# Altium PCB TSOP Board.PcbDoc
Units mm, origin at the board's own origin, x right, y up, seen from the top; angles counter-clockwise.
Board outline 100 x 100 mm, 2 copper layers (Top Layer, Bottom Layer); 56 components, 24 nets, 183 pads, 9 vias.
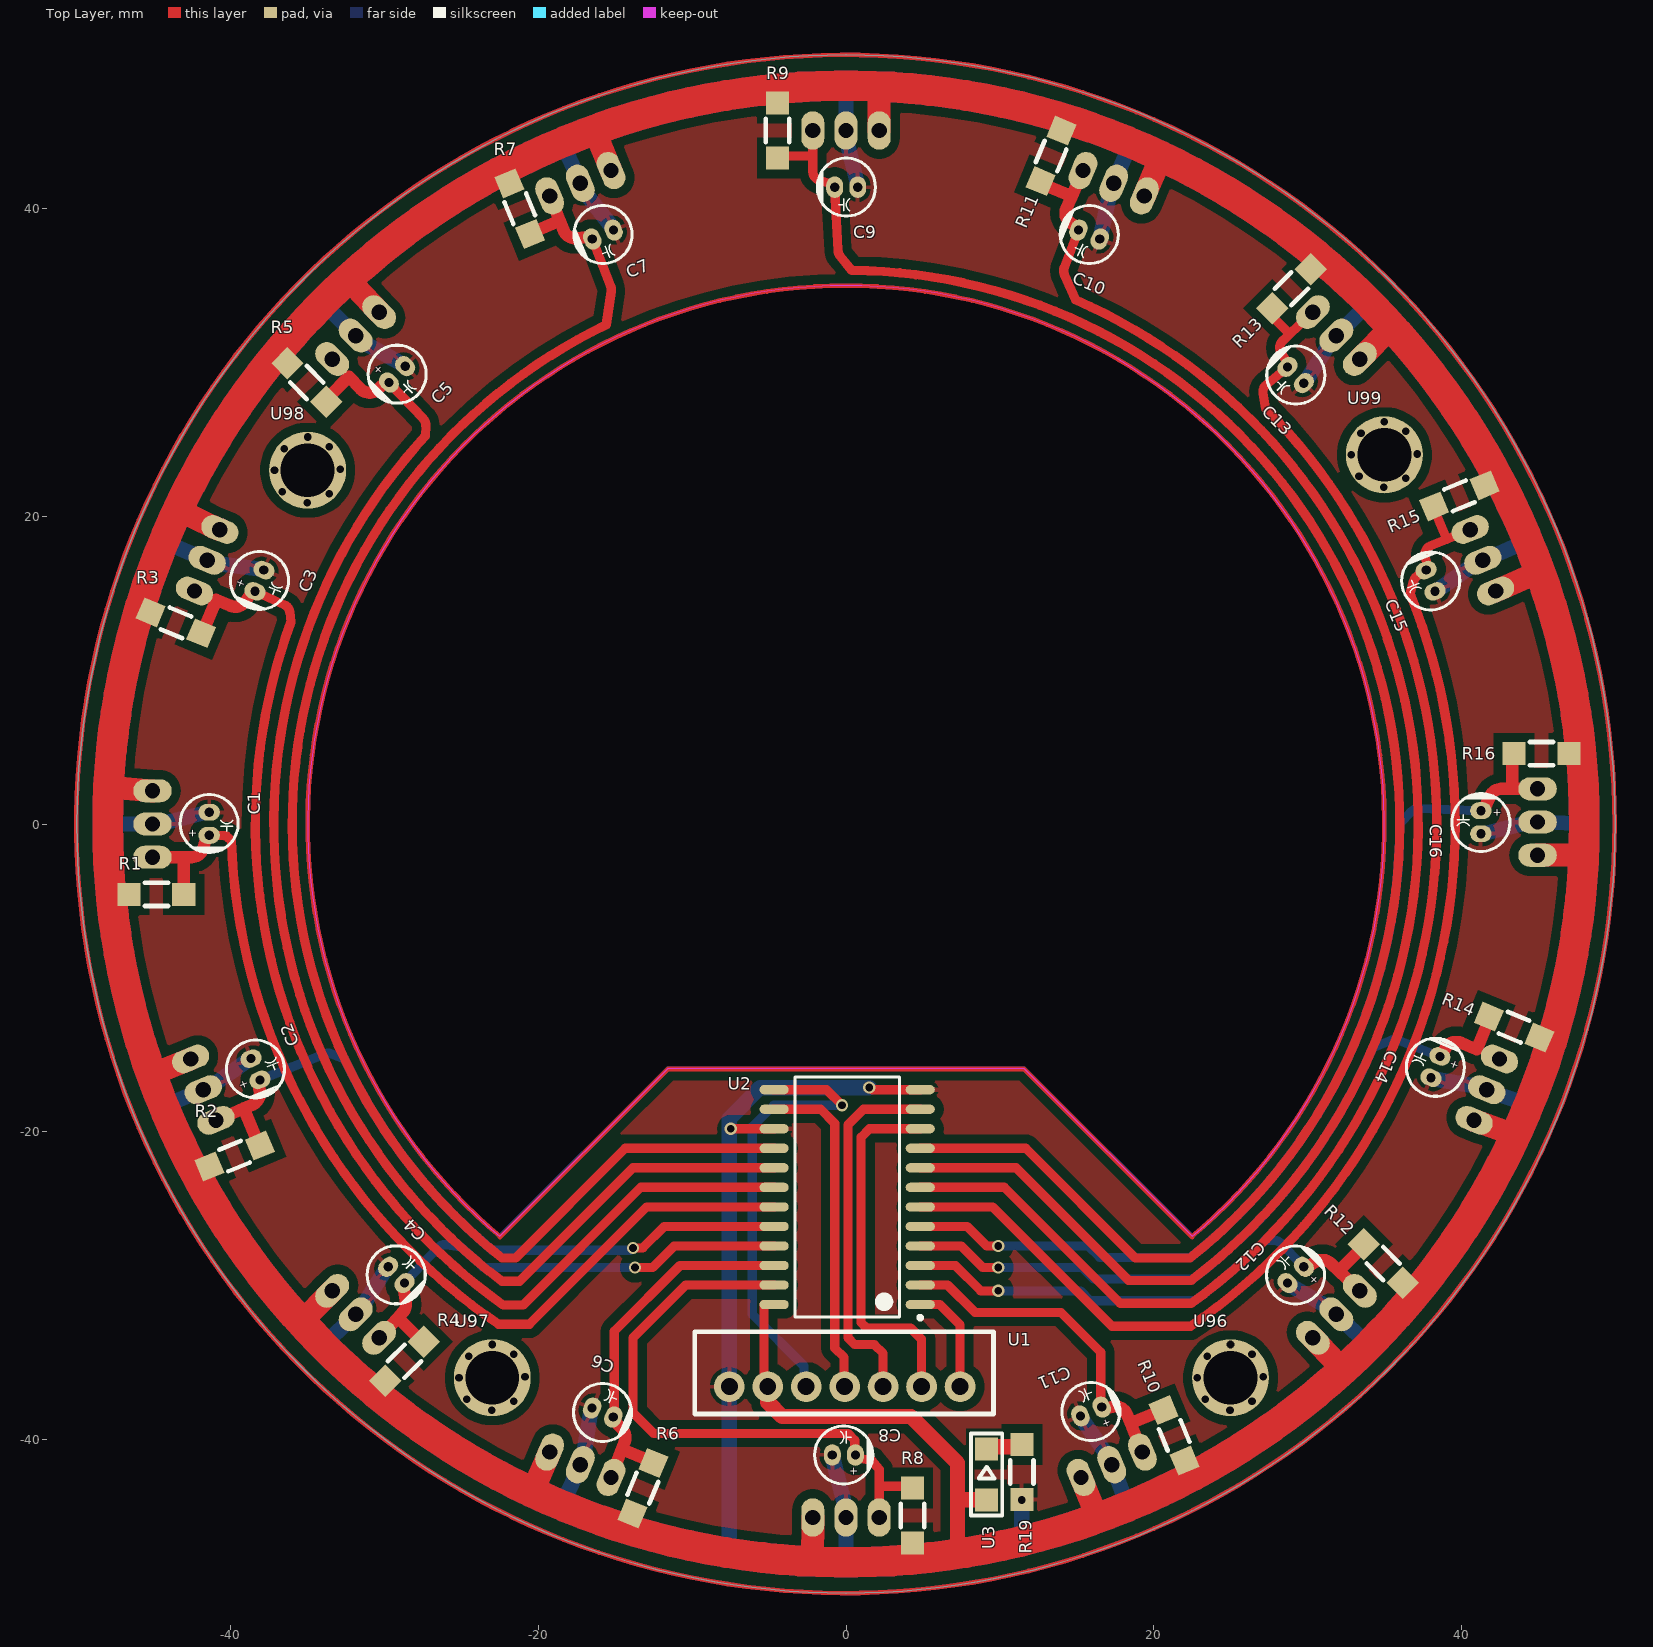
[diagram p0: Top Layer view]
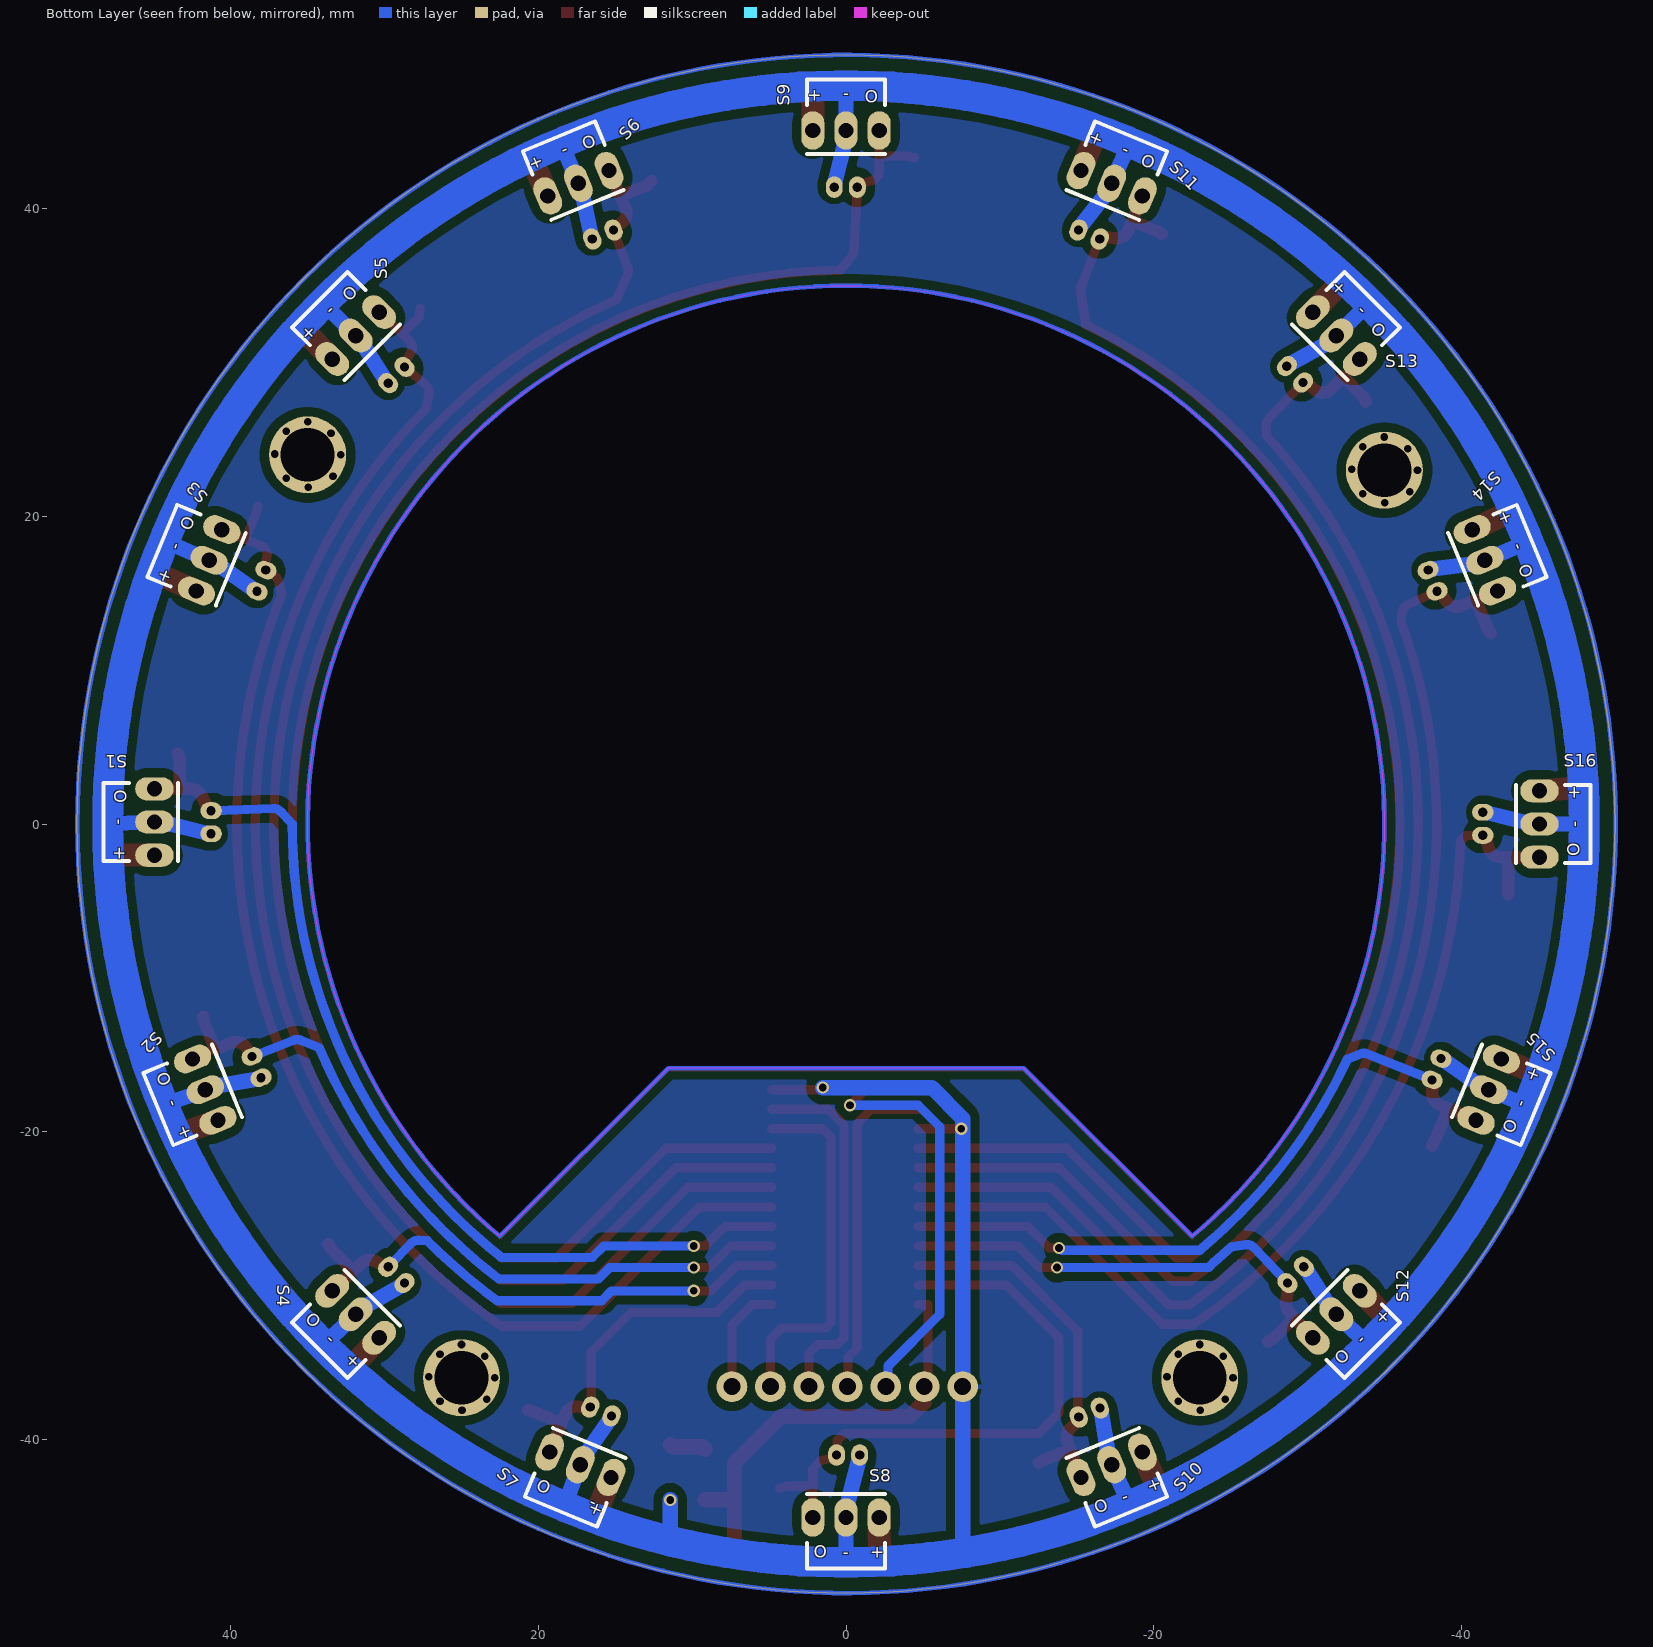
[diagram p1: Bottom Layer view, seen from below]
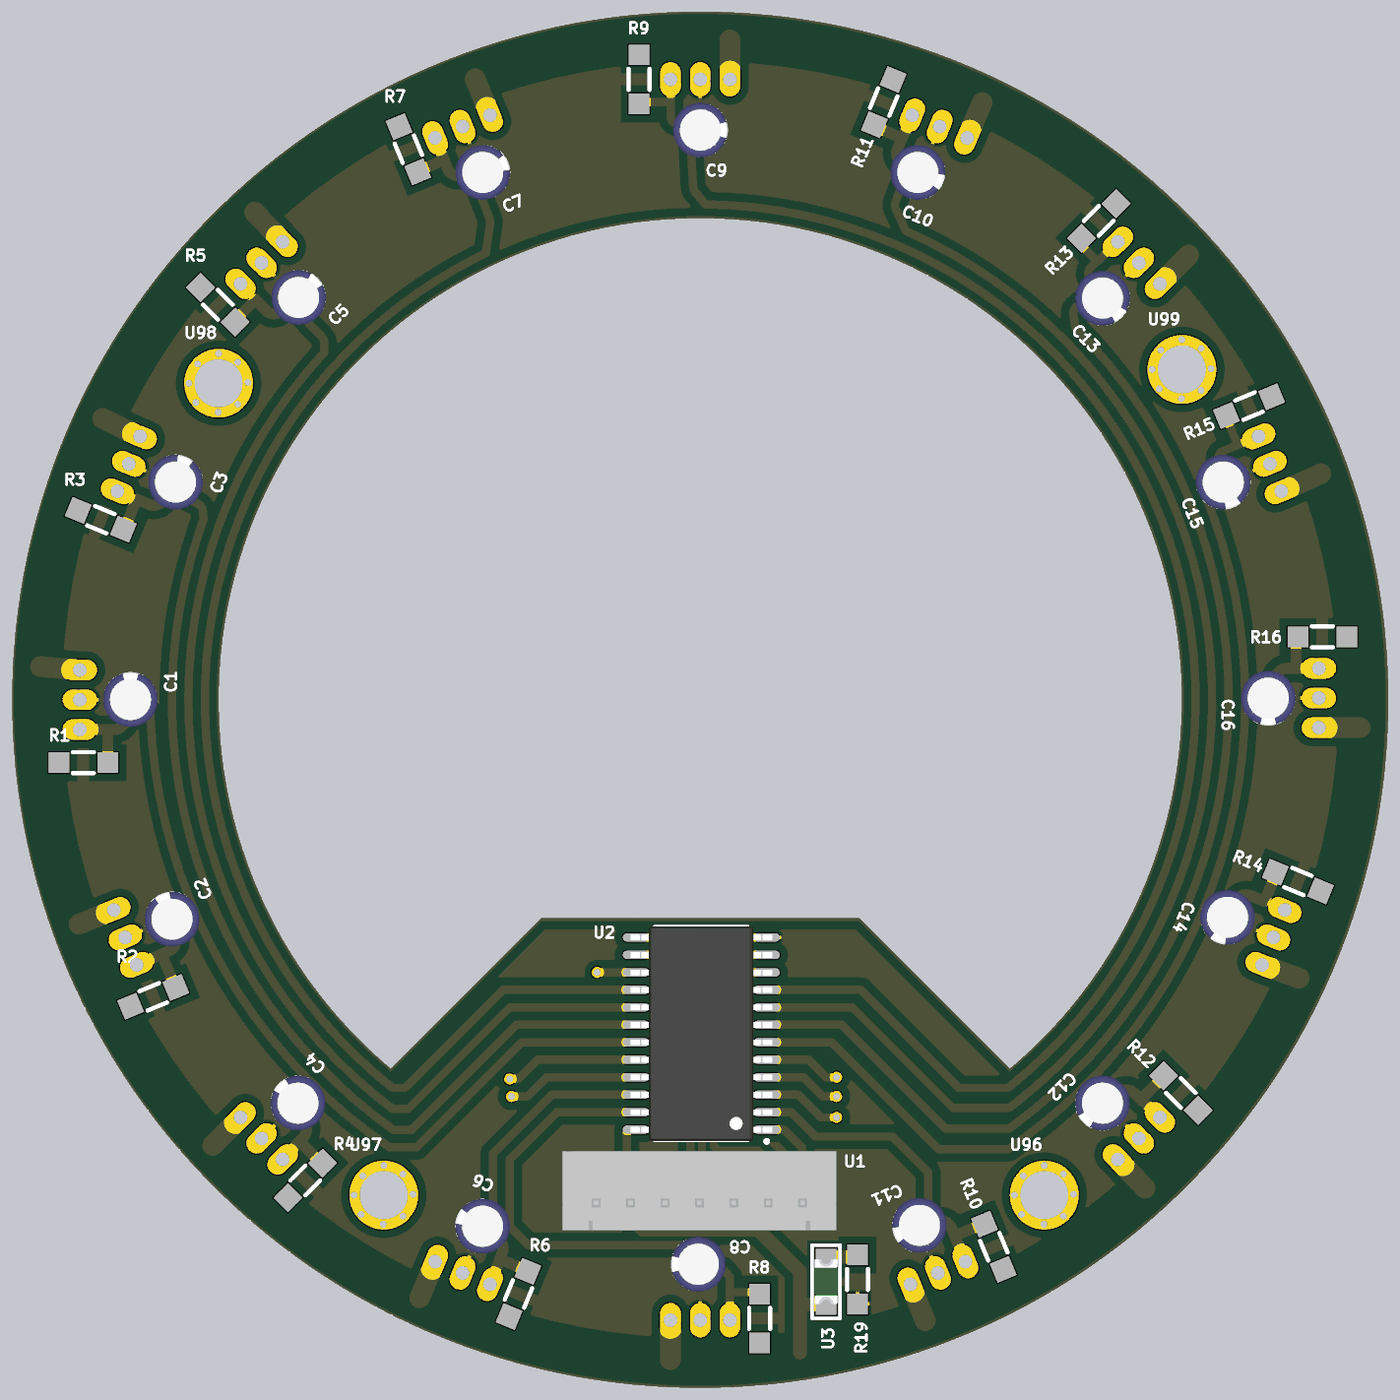
[diagram p2: 3D render of the assembled board from above, using the file's embedded part models]
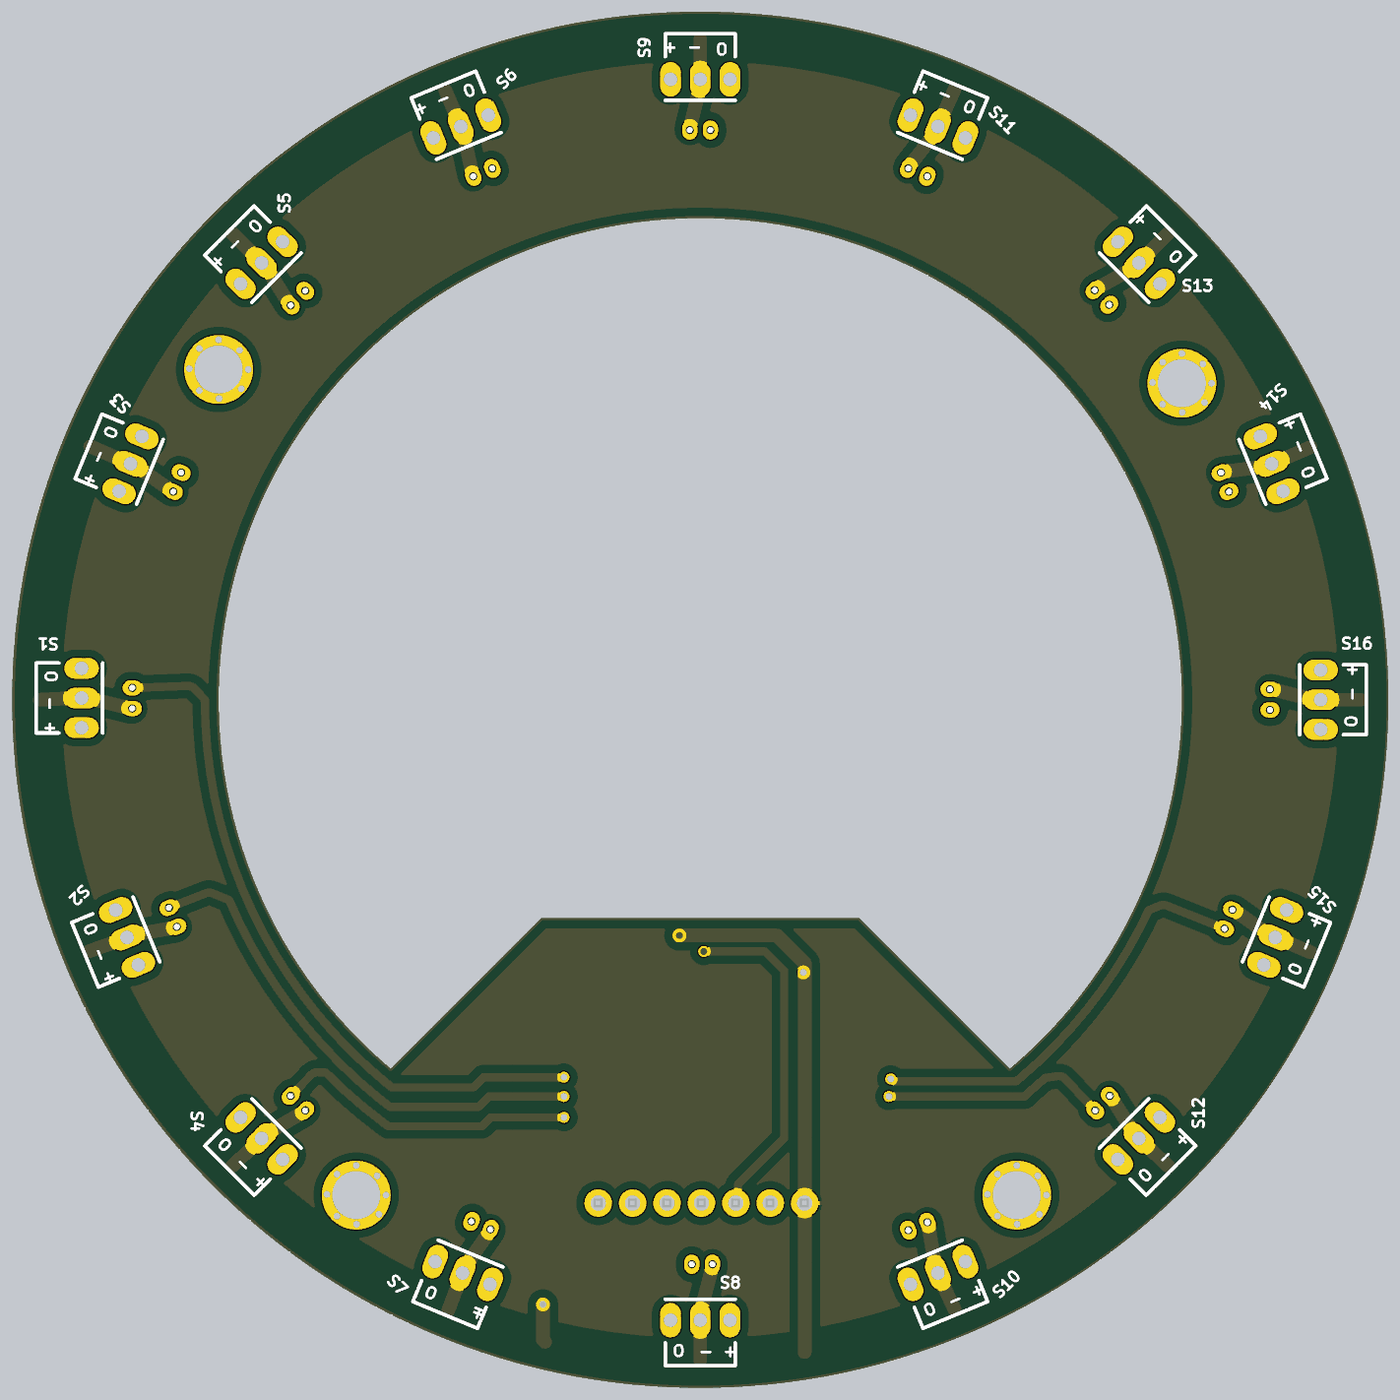
[diagram p3: 3D render of the assembled board from below, using the file's embedded part models]

## Layer stack, top to bottom
Top Solder: solder mask 0.0102, Solder Resist, Dk 3.5
Top Layer: signal copper 0.0356
Dielectric 1: dielectric 0.32, FR-4, Dk 4.8
Bottom Layer: signal copper 0.0356
Bottom Solder: solder mask 0.0102, Solder Resist, Dk 3.5

## Board outline
0,-50 cw(c0,0) -50,0 cw(c0,0) 0,50 cw(c0,0) 50,0 cw(c0,0)
cut-out: -22.498,-26.812 -11.561,-15.875 11.561,-15.875 22.498,-26.812 ccw(c0,0)

## Design rules (kind name [scope] priority, off if disabled: settings)
Clearance [All] p1: gap=0.254 ignorepadtopadclearanceinfootprint=FALSE except(0: Arc-Hole Track-Hole SMDPad-Hole THPad-Hole Via-Hole Fill-Hole Poly-Hole Region-Hole Text-Hole; 0.6: Arc-Fill Arc-Poly Arc-Region Track-Fill Track-Poly Track-Region SMDPad-Fill SMDPad-Poly SMDPad-Region THPad-Fill THPad-Poly THPad-Region Via-Fill Via-Poly Via-Region Fill-Fill Fill-Poly Fill-Region Poly-Poly Poly-Region Region-Region)
PolygonConnect [All] p1: connectstyle=Relief reliefconductorwidth=0.254 reliefentries=4 polygonreliefangle="90 Angle" airgapwidth=0.254
RoutingVias [All] p1: holewidth=0.6 width=0.8 viastyle="Through Hole" minholewidth=0.5 minwidth=0.8 maxholewidth=0.6 maxwidth=1
SolderMaskExpansion [All] p1: expansion=0.102 istentingtop=FALSE
Width [All] p1: maxlimit=2 minlimit=0.254 preferedwidth=0.254
30 further rules are at their usual default settings.

## Components (designator, comment, footprint, x,y, rotation, side; value= is the part's Value field where it differs from the comment)
C1 "Comment" "Cap electrolitic radial 4x7-1.5" -41.402,-0.738 r90 top
C2 "Comment" "Cap electrolitic radial 4x7-1.5" -38.1,-16.637 r112.5 top
C3 "Comment" "Cap electrolitic radial 4x7-1.5" -38.42,15.124 r67.5 top
C4 "Comment" "Cap electrolitic radial 4x7-1.5" -28.702,-29.845 r135 top
C5 "Comment" "Cap electrolitic radial 4x7-1.5" -29.718,28.702 r45 top
C6 "Comment" "Cap electrolitic radial 4x7-1.5" -15.124,-38.547 r157.5 top
C7 "Comment" "Cap electrolitic radial 4x7-1.5" -16.499,38.034 r22.5 top
C8 "Comment" "Cap electrolitic radial 4x7-1.5" 0.611,-41.021 r180 top
C9 "Comment" "Cap electrolitic radial 4x7-1.5" -0.738,41.402 r0 top
C10 "Comment" "Cap electrolitic radial 4x7-1.5" 15.113,38.608 r337.5 top
C11 "Comment" "Cap electrolitic radial 4x7-1.5" 16.626,-37.907 r202.5 top
C12 "Comment" "Cap electrolitic radial 4x7-1.5" 29.763,-28.784 r225 top
C13 "Comment" "Cap electrolitic radial 4x7-1.5" 28.702,29.718 r315 top
C14 "Comment" "Cap electrolitic radial 4x7-1.5" 38.608,-15.113 r247.5 top
C15 "Comment" "Cap electrolitic radial 4x7-1.5" 37.719,16.51 r292.5 top
C16 "Comment" "Cap electrolitic radial 4x7-1.5" 41.275,0.865 r270 top
R1 "Comment" RES1206 -44.831,-4.572 r180 top
R2 "Comment" RES1206 -39.751,-21.59 r202.5 top
R3 "Comment" RES1206 -43.561,13.081 r157.5 top
R4 "Comment" RES1206 -28.702,-34.925 r225 top
R5 "Comment" RES1206 -35.052,28.702 r135 top
R6 "Comment" RES1206 -13.208,-43.18 r247.5 top
R7 "Comment" RES1206 -21.209,40.005 r112.5 top
R8 "Comment" RES1206 4.318,-44.958 r270 top
R9 "Comment" RES1206 -4.445,45.085 r90 top
R10 "Comment" RES1206 21.336,-39.751 r292.5 top
R11 "Comment" RES1206 13.335,43.434 r67.5 top
R12 "Comment" RES1206 34.925,-28.575 r315 top
R13 "Comment" RES1206 28.956,34.798 r45 top
R14 "Comment" RES1206 43.434,-13.208 r337.5 top
R15 "Comment" RES1206 39.878,21.336 r22.5 top
R16 "Comment" RES1206 45.212,4.572 r0 top
R19 "Comment" RES1206 11.43,-42.127 r270 top
S1 "Comment" TSOP 44.958,0.127 r270 bottom
S2 "Comment" TSOP 41.656,-17.272 r247.5 bottom
S3 "Comment" TSOP 41.402,17.145 r292.5 bottom
S4 "Comment" TSOP 31.877,-31.877 r225 bottom
S5 "Comment" TSOP 31.877,31.75 r315 bottom
S6 "Comment" TSOP 17.399,41.656 r337.5 bottom
S7 "Comment" TSOP 17.272,-41.656 r202.5 bottom
S8 "Comment" TSOP 0,-45.085 r180 bottom
S9 "Comment" TSOP 0,45.085 r0 bottom
S10 "Comment" TSOP -17.272,-41.656 r157.5 bottom
S11 "Comment" TSOP -17.272,41.656 r22.5 bottom
S12 "Comment" TSOP -31.877,-31.877 r135 bottom
S13 "Comment" TSOP -31.877,31.75 r45 bottom
S14 "Comment" TSOP -41.529,17.145 r67.5 bottom
S15 "Comment" TSOP -41.783,-17.272 r112.5 bottom
S16 "Comment" TSOP -45.085,0 r90 bottom
U1 "Comment" "XH 7PIN" -0.064,-38.1 r0 top locked
U2 "Comment" 4067 0.076,-24.257 r180 top locked
U3 "Comment" "LED GREEN 1206" 9.144,-42.291 r90 top
U96 "Comment" SCREW 25,-36 r0 top
U97 "Comment" SCREW -23,-36 r0 top
U98 "Comment" SCREW -35,23 r0 top
U99 "Comment" SCREW 35,24 r0 top

## Footprints (in the part's own frame and the unit in brackets; to place one, negate y for a bottom-side part, rotate by r counter-clockwise, add the part's x,y. Pads: shape width x height; smd on the part's side, far side on the other; paste and mask are expansions set on the pad)
4067 [mm] "SOP, 24-Leads, Body 15.40x7.50mm, Pitch 1.27mm, IPC Medium Density"
  oval 1.9x0.6 smd: 1(-4.75,6.985) 2(-4.75,5.715) 3(-4.75,4.445) 4(-4.75,3.175) 5(-4.75,1.905) 6(-4.75,0.635) 7(-4.75,-0.635) 8(-4.75,-1.905) 9(-4.75,-3.175) 10(-4.75,-4.445) 11(-4.75,-5.715) 12(-4.75,-6.985) 13(4.75,-6.985) 14(4.75,-5.715) 15(4.75,-4.445) 16(4.75,-3.175) 17(4.75,-1.905) 18(4.75,-0.635) 19(4.75,0.635) 20(4.75,1.905) 21(4.75,3.175) 22(4.75,4.445) 23(4.75,5.715) 24(4.75,6.985)
  silkscreen extent -4.88,-7.8 3.4,7.96, body extent -5.15,-7.8 5.15,7.8, height 2.65
"Cap electrolitic radial 4x7-1.5" [mm] "Cap electrolitic radial 5x11-2-Design:Ali Hafizi"
  oval 1.1x1.4 hole 0.6: 1(0,0) 2(1.5,0)
  silkscreen extent -1.12,-1.89 2.65,1.89, body extent -1.25,-2 2.75,2, height 8.5
"LED GREEN 1206" [mm]
  rect 1.5x1.5 smd: 1(-1.651,0) 2(1.651,0)
  silkscreen extent -2.67,-1.02 2.67,1.02, body extent -1.63,-0.83 1.64,0.82, height 0.9
RES1206 [mm]
  rect 1.5x1.5 smd: 1(-1.778,0) 2(1.778,0)
  silkscreen extent -0.76,-0.76 0.76,0.76, body extent -1.58,-0.82 1.58,0.82, height 0.53
SCREW [mm]
  round 5 hole 3.5: 1(0,0)
  round 0 hole 0.5: ""(-2.159,0) ""(-1.651,-1.397) ""(-1.524,1.397) ""(-0.031,-2.11) ""(0,2.159) ""(1.397,-1.524) ""(1.397,1.524) ""(2.128,0.059)
TSOP [mm]
  oval 1.5x2.5 hole 1: 1(-2.159,0) 2(0,0) 3(2.159,0)
  silkscreen extent -2.54,-3.3 2.54,1.52, body extent -2.54,-3.4 2.54,1.4, height 11
"XH 7PIN" [mm]
  round 2 hole 1.1: 1(-7.523,1.524) 2(-5.023,1.524) 3(-2.523,1.524) 4(-0.023,1.524) 5(2.477,1.524) 6(4.977,1.524) 7(7.477,1.524)
  silkscreen extent -9.78,-0.25 9.65,5.08, body extent -9.95,-0.46 9.95,5.29, height 7

## Via types
v1: diameter 0.8, hole 0.5, Top Layer to Bottom Layer, 9 vias

## Nets (pads, with @x,y where several pads share a name; then routed paths per layer and width w, separated by ;. In a path a pad name is that pad's centre, name@x,y a point inside that pad or via, vN(x,y) a via of type N, cw(c..) or ccw(c..) an arc to the next point about the centre after c; other vN are vias at no path point)
ADD1: U1.6 U2.10 | length 23.6
  Top Layer w0.6: U2.10 1.524,-19.812 0.981,-20.355 0.981,-32.415 1.332,-32.766 4.191,-32.766 4.913,-33.488 U1.6
ADD2: U1.5 U2.11 | length 23.8
  Top Layer w0.6: U1.5 2.413,-34.417 1.841,-33.845 0.571,-33.845 0.127,-33.401 0.127,-19.558 1.143,-18.542 U2.11
ADD3: U1.4 U2.14 | length 21.7
  Top Layer w0.6: U2.14 -1.651,-18.542 -0.727,-19.466 -0.727,-34.071 -0.122,-34.676 -0.122,-36.541 U1.4
ADD4: U1.3 U2.13 | length 29.6
  Top Layer w0.6: U2.13 -1.27,-17.272 v1(-0.254,-18.288)
  Bottom Layer w0.6: U1.3 -2.735,-36.427 -2.735,-35.238 -6.096,-31.877 -6.096,-19.685 -4.699,-18.288 v1(-0.254,-18.288)
GND: C1.2 C2.2 C3.2 C4.2 C5.2 C6.2 C7.2 C8.2 C9.2 C10.2 C11.2 C12.2 C13.2 C14.2 C15.2 C16.2 R19.2 S1.2 S2.2 S3.2 S4.2 S5.2 S6.2 S7.2 S8.2 S9.2 S10.2 S11.2 S12.2 S13.2 S14.2 S15.2 S16.2 U1.1 U2.12 U2.15 | length 456.5
  Top Layer w0.6: v1(-7.493,-19.812) U2.15 ; v1(1.513,-17.134) 1.567,-17.134 1.705,-17.272 U2.12
  Bottom Layer w1: -48,0 S16.2 -44.585,0 -41.552,0.762 C1.2 ; -44.353,-18.353 -42.245,-17.463 S15.2 -41.321,-17.081 -38.813,-15.309 C2.2 ; -44.353,18.353 -41.991,17.336 S14.2 -41.067,16.954 -37.985,16.567 C3.2 ; -34.004,-33.878 -32.231,-32.231 S12.2 -31.523,-31.523 -29.869,-28.89 C4.2 ; -34.005,33.878 -32.231,32.104 S13.2 -31.523,31.396 -28.763,29.869 C5.2 ; -18.48,-44.3 -17.463,-42.118 S10.2 -17.081,-41.194 -16.567,-38.112 C6.2 ; -18.462,44.308 -17.463,42.118 S11.2 -17.081,41.194 -15.17,38.747 C7.2 ; -7.584,-47.397 -7.587,-47.394 U1.1 -7.587,-19.144 -5.577,-17.134 v1(1.513,-17.134) ; C8.2 -0.889,-41.171 0,-44.585 S8.2 0,-45.585 0,-48 ; 0,48 0,45.585 S9.2 0,44.585 0.762,41.552 C9.2 ; 11.283,-46.655 11.43,-46.508 v1(11.43,-43.942) ; C11.2 15.297,-38.62 17.081,-41.194 S7.2 17.463,-42.118 18.308,-44.371 ; C10.2 16.556,38.173 17.208,41.194 S6.2 17.59,42.118 18.525,44.281 ; C12.2 28.808,-29.951 31.523,-31.523 S4.2 32.231,-32.231 34.004,-33.878 ; C13.2 29.869,28.763 31.523,31.396 S5.2 32.231,32.104 34.004,33.878 ; C14.2 38.173,-16.556 41.194,-17.081 S2.2 42.118,-17.463 44.39,-18.263 ; C15.2 38.432,15.182 40.94,16.954 S3.2 41.864,17.336 44.326,18.416 ; C16.2 41.425,-0.635 44.458,0.127 S1.2 45.458,0.127 48,0
  Bottom Layer w2: 48,0 ccw(c0,0) 48,0
LED: R19.1 U3.2 | length 2.4
  Top Layer w1: U3.2 9.29,-40.494 11.284,-40.494 R19.1
OUT: U1.7 U2.1 | length 7.1
  Top Layer w0.6: U2.1 6.096,-31.242 7.413,-32.559 U1.7
S0: C9.1 R9.1 S9.1 U2.9 | length 121.7
  Top Layer w0.6: R9.1 -3.995,43.434 -2.159,43.434 ; S9.1 -2.159,44.585 -2.159,43.434 ; U2.9 11.684,-21.082 18.812,-28.21 22.365,-28.21 ccw(c0,0) 0.379,35.998 -0.384,36.932 -0.385,36.933 cw(c0.081,37.312) -0.518,37.279 -0.738,41.252 C9.1 -0.738,41.552 -1.732,41.852 cw(c-1.559,42.426) -2.159,42.426 -2.159,43.434
S1: C10.1 R11.1 S6.1 U2.8 | length 109.8
  Top Layer w0.6: U2.8 11.049,-22.352 18.365,-29.668 22.442,-29.668 ccw(c0,0) 14.931,34.072 14.198,35.715 14.197,35.716 cw(c14.746,35.959) 14.185,36.172 15.056,38.469 C10.1
  Top Layer w0.8: R11.1 12.926,41.531 14.676,40.806 ; C10.1 15.17,38.747 14.687,39.007 cw(c15.067,39.712) 14.334,40.034 14.335,40.035 14.676,40.806 ; S6.1 15.213,42.02 14.676,40.806
S2: C13.1 R13.1 S5.1 U2.7 | length 97.3
  Top Layer w0.6: U2.7 10.287,-23.622 17.825,-31.16 22.441,-31.16 ccw(c0,0) 27.274,27.031 27.11,27.983 27.109,27.984 cw(c27.701,28.085) 27.317,28.546 28.596,29.612 C13.1 28.808,29.824 28.285,30.65 cw(c28.791,30.971) 28.381,31.409 28.853,31.851 ; R13.1 27.749,32.955 28.853,31.851 ; S5.1 29.997,32.923 28.853,31.851
S3: C15.1 R15.1 S3.1 U2.6 | length 83.4
  Top Layer w0.6: U2.6 9.525,-24.892 17.287,-32.654 22.402,-32.654 ccw(c0,0) 36.665,14.962 36.897,15.788 ; 36.897,15.789 cw(c37.475,15.626) 37.116,16.107 37.58,16.453 C15.1 37.858,16.567 37.649,17.37 cw(c38.23,17.521) 37.999,18.075 38.001,18.076 39.057,18.512 ; R15.1 38.351,20.216 39.057,18.512 ; S3.1 40.114,18.948 39.057,18.512
S4: C16.1 R16.1 S1.1 U2.5 | length 63.2
  Top Layer w0.6: U2.5 7.874,-26.162 9.144,-27.432 v1(9.906,-27.432)
  Top Layer w0.8: C16.1 41.425,0.865 41.885,1.83 cw(c42.607,1.486) 42.607,2.286 43.307,2.286 ; R16.1 43.307,4.222 43.307,2.286 ; S1.1 43.307,2.286
  Bottom Layer w0.6: v1(9.906,-27.432) 15.748,-27.432 16.49,-28.174 22.411,-28.174 ccw(c0,0) 36,0 36.771,0.818 cw(c37.208,0.407) 37.229,1.006 41.125,0.865 C16.1
S5: C14.1 R14.1 S2.1 U2.4 | length 47.9
  Top Layer w0.6: U2.4 7.493,-27.432 8.89,-28.829 v1(9.906,-28.829)
  Top Layer w0.8: C14.1 38.722,-15.16 38.93,-14.658 cw(c39.669,-14.964) 39.978,-14.226 39.979,-14.227 41,-14.656 41.734,-12.883 R14.1
  Bottom Layer w0.6: v1(9.906,-28.829) 15.367,-28.829 16.113,-29.575 22.564,-29.575 ccw(c0,0) 34.234,-14.555 35.466,-14.059 35.467,-14.059 cw(c35.69,-14.616) 35.908,-14.057 38.469,-15.056 C14.1
S6: C12.1 R12.1 S4.1 U2.3 | length 35
  Top Layer w0.6: U2.3 7.112,-28.702 8.763,-30.353 v1(9.906,-30.353)
  Top Layer w0.8: C12.1 29.869,-28.89 30.516,-28.467 cw(c30.954,-29.137) 31.499,-28.552 32.034,-29.05 ; S4.1 33.05,-29.997 32.034,-29.05 ; R12.1 33.47,-27.615 32.034,-29.05
  Bottom Layer w0.6: v1(9.906,-30.353) 15.24,-30.353 15.881,-30.994 22.669,-30.994 ccw(c0,0) 27.212,-27.093 27.797,-27.064 cw(c27.827,-27.664) 28.256,-27.244 29.657,-28.678 C12.1
S7: C11.1 R10.1 S7.1 U2.2 | length 24.1
  Top Layer w0.6: U2.2 6.604,-29.972 8.382,-31.75 13.97,-31.75 16.568,-34.348 16.568,-37.85 C11.1
  Top Layer w0.8: C11.1 16.683,-38.046 17.321,-37.892 cw(c17.509,-38.67) 18.247,-38.363 18.248,-38.364 18.493,-38.957 ; S7.1 19.075,-40.368 18.493,-38.957 ; R10.1 20.315,-38.202 18.493,-38.957
S8: C8.1 R8.1 S8.1 U2.23 | length 38.9
  Top Layer w0.6: U2.23 -10.414,-29.972 -13.843,-33.401 -13.843,-38.276 -12.495,-39.624 0.127,-39.624 0.567,-40.064 0.567,-41.127 0.611,-41.171 1.671,-41.374 2.159,-41.964 2.159,-43.053 ; S8.1 2.159,-44.585 2.159,-43.053 ; R8.1 3.868,-43.053 2.159,-43.053
S9: C6.1 R6.1 S10.1 U2.22 | length 24.4
  Top Layer w0.6: C6.1 -15.067,-38.49 -15.067,-32.974 -10.795,-28.702 U2.22
  Top Layer w0.8: S10.1 -15.086,-42.02 -14.567,-40.654 ; C6.1 -15.182,-38.686 -14.559,-39.316 cw(c-15.128,-39.878) -14.379,-40.16 -14.38,-40.162 -14.567,-40.654 ; R6.1 -12.837,-41.371 -14.567,-40.654
S10: C4.1 R4.1 S12.1 U2.21 | length 32.8
  Top Layer w0.6: v1(-13.716,-28.829) -12.573,-28.829 -11.176,-27.432 U2.21
  Top Layer w0.8: S12.1 -29.997,-33.05 -29.123,-32.095 ; C4.1 -28.808,-29.951 -28.611,-31.074 cw(c-29.399,-31.212) -28.809,-31.752 -29.123,-32.095 ; R4.1 -27.745,-33.473 -29.123,-32.095
  Bottom Layer w0.6: C4.1 -28.596,-29.739 -26.504,-27.531 cw(c-26.068,-27.943) -25.984,-27.349 -25.982,-27.349 -25.074,-27.48 ccw(c0,0) -23.912,-28.497 -23.58,-28.829 v1(-13.716,-28.829)
S11: C2.1 R2.1 S15.1 U2.20 | length 47.8
  Top Layer w0.6: v1(-13.843,-27.559) -13.841,-27.557 -13.206,-27.557 -11.811,-26.162 U2.20
  Top Layer w0.8: S15.1 -40.495,-19.075 -39.14,-18.486 ; R2.1 -38.266,-20.596 -39.14,-18.486 ; C2.1 -38.239,-16.694 -38.114,-17.362 cw(c-38.9,-17.509) -38.581,-18.243 -39.14,-18.486
  Bottom Layer w0.6: C2.1 -37.961,-16.58 -33.88,-14.949 cw(c-33.657,-15.506) -33.432,-14.95 ; -33.431,-14.95 -32.59,-15.292 ccw(c0,0) -23.14,-27.578 -23.006,-27.712 -14.05,-27.712 -13.897,-27.559 v1(-13.843,-27.559)
S12: C1.1 R1.1 S16.1 U2.19 | length 66.9
  Top Layer w0.6: C1.1 -41.252,-0.738 -40.534,-0.754 -40.366,-0.758 cw(c-40.38,-1.357) -40.288,-0.764 -40.123,-0.929 cw(c-40.547,-1.354) -40.122,-0.93 -39.957,-1.095 ccw(c-0.181,0.379) -22.584,-32.521 -20.583,-32.521 -12.954,-24.892 U2.19
  Top Layer w0.8: S16.1 -43.053,-2.159 ; R1.1 -43.053,-2.159 ; C1.1 -41.552,-0.738 -41.785,-1.574 cw(c-42.556,-1.359) -42.556,-2.159 -43.053,-2.159
S13: C3.1 R3.1 S14.1 U2.18 | length 79.6
  Top Layer w0.6: C3.1 -38.281,15.067 -36.497,14.237 cw(c-36.751,13.693) -36.155,13.766 ; -36.155,13.764 -36.08,13.144 ccw(c0,0) -22.284,-31.273 -20.986,-31.273 -13.335,-23.622 U2.18
  Top Layer w0.8: R3.1 -41.726,12.7 -40.952,14.569 -40.951,14.57 -40.009,14.181 -40.007,14.181 ccw(c-39.704,14.921) -39.043,14.471 -38.559,15.182 C3.1
S14: C5.1 R5.1 S13.1 U2.17 | length 92.9
  Top Layer w0.6: C5.1 -29.612,28.596 -27.477,26.343 cw(c-27.913,25.931) -27.313,25.912 -27.335,25.232 ccw(c0,0) -22.361,-29.729 -21.22,-29.729 -13.843,-22.352 U2.17
  Top Layer w0.8: R5.1 -33.623,27.768 -32.309,29.082 -31.569,28.295 -31.567,28.294 ccw(c-30.986,28.843) -30.453,28.246 -29.824,28.808 C5.1
S15: C7.1 R7.1 S11.1 U2.16 | length 106
  Top Layer w0.6: C7.1 -16.441,37.895 -15.297,34.945 cw(c-15.857,34.729) -15.263,34.642 ; -15.263,34.641 -15.587,32.451 ccw(c0,0) -22.365,-28.21 -21.479,-28.21 -14.351,-21.082 U2.16
  Top Layer w0.8: R7.1 -20.226,38.546 -18.611,39.215 ; S11.1 -19.075,40.368 -18.611,39.215 ; C7.1 -16.556,38.173 -17.539,38.082 cw(c-17.612,38.879) -18.354,38.578 -18.354,38.58 -18.611,39.215
VCC: R1.2 R2.2 R3.2 R4.2 R5.2 R6.2 R7.2 R8.2 R9.2 R10.2 R11.2 R12.2 R13.2 R14.2 R15.2 R16.2 S1.3 S2.3 S3.3 S4.3 S5.3 S6.3 S7.3 S8.3 S9.3 S10.3 S11.3 S12.3 S13.3 S14.3 S15.3 S16.3 U1.2 U2.24 U3.1 | length 376.9
  Top Layer w0.6: U1.2 -5.334,-36.329 -5.334,-31.252 -5.324,-31.242 U2.24 ; 7.251,-44.069 7.378,-43.942
  Top Layer w1: U1.2 -5.087,-37.585 -4.156,-38.516 4.226,-38.516 4.519,-38.809 7.251,-41.541 7.251,-44.069 7.251,-47.449 ; 7.378,-43.942 U3.1
  Top Layer w1.5: -47.939,2.41 S16.3 ; -45.143,-16.312 S15.3 ; -43.428,20.444 -41.165,19.331 S14.3 ; -35.431,-32.383 S12.3 ; -32.383,35.431 S13.3 ; -20.389,-43.454 S10.3 ; -16.353,45.129 S11.3 ; -2.168,-47.951 S8.3 ; 2.151,47.952 S9.3 ; S7.3 16.353,-45.129 ; S6.3 20.493,43.405 ; S4.3 32.32,-35.488 ; S5.3 35.488,32.32 ; S2.3 43.526,-20.236 ; S3.3 42.69,15.342 45.103,16.424 ; S1.3 47.957,-2.025
  Top Layer w2: 48,0 ccw(c0,0) 48,0
pads on no net: U96. U96.1 U97. U97.1 U98. U98.1 U99. U99.1
copper on no net: | length 1078.5
  Top Layer w0.3: -22.498,-26.812 cw(c0,0) 22.498,-26.812 ; -22.496,-26.861 -11.56,-15.924 11.562,-15.924 22.499,-26.861 ; 49.964,0 ccw(c-0.036,0) 49.964,0
  Bottom Layer w0.3: -22.498,-26.812 cw(c0,0) 22.498,-26.812 11.561,-15.875 -11.561,-15.875 -22.498,-26.812 ; 49.964,0 ccw(c-0.036,0) 49.964,0

## Polygon pours and split planes (outlines as drawn)
GND on Top Layer "GND_L01_P000" (solid, pour order 0): 0,-50 cw(c0,0) -50,0 cw(c0,0) 0,50 cw(c0,0) 50,0 cw(c0,0)
GND on Bottom Layer "GND_L02_P001" (solid, pour order 1): 0,-50 cw(c0,0) -50,0 cw(c0,0) 0,50 cw(c0,0) 50,0 cw(c0,0)

## Silkscreen, mask and mechanical layers (free items; w line width, h text height)
Mechanical 1:
  circle w0.3: c-0.036,0 r50
  lines w0.3: -22.498,-26.812 cw(c0,0) 22.498,-26.812 11.561,-15.875 -11.561,-15.875 -22.498,-26.812

## Text inside footprints (layer, text, board x,y; h text height)
C1: Top Overlay "+" at -42.242,-0.908 h0.5 r90
C2: Top Overlay "+" at -38.811,-17.116 h0.5 r112.5
C3: Top Overlay "+" at -39.261,15.289 h0.5 r67.5
C5: Top Overlay "+" at -30.432,29.176 h0.5 r45
C8: Top Overlay "+" at 0.781,-41.861 h0.5 r180
C11: Top Overlay "+" at 17.104,-38.618 h0.5 r202.5
C12: Top Overlay "+" at 30.477,-29.258 h0.5 r225
C14: Top Overlay "+" at 39.449,-15.277 h0.5 r247.5
C16: Top Overlay "+" at 42.115,1.035 h0.5 r270
S1: Bottom Overlay "O" at 47.572,2.233 h0.8 r90; Bottom Overlay "-" at 47.591,0.328 h0.8 r90; Bottom Overlay "+" at 47.578,-1.45 h0.8 r90
S2: Bottom Overlay "O" at 44.877,-16.327 h0.8 r67.5; Bottom Overlay "-" at 44.165,-18.094 h0.8 r67.5; Bottom Overlay "+" at 43.473,-19.732 h0.8 r67.5
S3: Bottom Overlay "O" at 43.011,20.091 h0.8 r112.5; Bottom Overlay "-" at 43.758,18.338 h0.8 r112.5; Bottom Overlay "+" at 44.426,16.691 h0.8 r112.5
S4: Bottom Overlay "O" at 35.215,-32.236 h0.8 r45; Bottom Overlay "-" at 33.881,-33.597 h0.8 r45; Bottom Overlay "+" at 32.615,-34.845 h0.8 r45
S5: Bottom Overlay "O" at 32.236,35.088 h0.8 r135; Bottom Overlay "-" at 33.597,33.754 h0.8 r135; Bottom Overlay "+" at 34.845,32.488 h0.8 r135
S6: Bottom Overlay "O" at 16.454,44.877 h0.8 r157.5; Bottom Overlay "-" at 18.221,44.165 h0.8 r157.5; Bottom Overlay "+" at 19.859,43.473 h0.8 r157.5
S7: Bottom Overlay "O" at 20.218,-43.265 h0.8 r22.5; Bottom Overlay "-" at 16.741,-44.353 h0.8 r22.5; Bottom Overlay "+" at 16.818,-44.68 h0.8 r22.5
S8: Bottom Overlay "O" at 2.106,-47.699 h0.8; Bottom Overlay "-" at 0.201,-47.718 h0.8; Bottom Overlay "+" at -1.577,-47.705 h0.8
S9: Bottom Overlay "O" at -2.106,47.699 h0.8 r180; Bottom Overlay "+" at 1.577,47.705 h0.8 r180; Bottom Overlay "-" at -0.201,47.718 h0.8 r180
S10: Bottom Overlay "O" at -16.327,-44.877 h0.8 r337.5; Bottom Overlay "-" at -18.094,-44.165 h0.8 r337.5; Bottom Overlay "+" at -19.732,-43.473 h0.8 r337.5
S11: Bottom Overlay "O" at -20.218,43.265 h0.8 r202.5; Bottom Overlay "-" at -18.465,44.012 h0.8 r202.5; Bottom Overlay "+" at -16.818,44.68 h0.8 r202.5
S12: Bottom Overlay "O" at -32.236,-35.215 h0.8 r315; Bottom Overlay "-" at -33.597,-33.881 h0.8 r315; Bottom Overlay "+" at -34.845,-32.615 h0.8 r315
S13: Bottom Overlay "O" at -35.215,32.109 h0.8 r225; Bottom Overlay "-" at -33.881,33.47 h0.8 r225; Bottom Overlay "+" at -32.615,34.718 h0.8 r225
S14: Bottom Overlay "O" at -44.75,16.2 h0.8 r247.5; Bottom Overlay "-" at -44.038,17.967 h0.8 r247.5; Bottom Overlay "+" at -43.346,19.605 h0.8 r247.5
S15: Bottom Overlay "O" at -43.392,-20.218 h0.8 r292.5; Bottom Overlay "-" at -44.139,-18.465 h0.8 r292.5; Bottom Overlay "+" at -44.807,-16.818 h0.8 r292.5
S16: Bottom Overlay "O" at -47.699,-2.106 h0.8 r270; Bottom Overlay "-" at -47.718,-0.201 h0.8 r270; Bottom Overlay "+" at -47.705,1.577 h0.8 r270